# Altium PCB MainPCB.PcbDoc
Units mm, origin at the board's own origin, x right, y up, seen from the top; angles counter-clockwise.
Board outline 80.52 x 140.08 mm, 2 copper layers (Top Layer, Bottom Layer); 58 components, 58 nets, 243 pads, 38 vias.
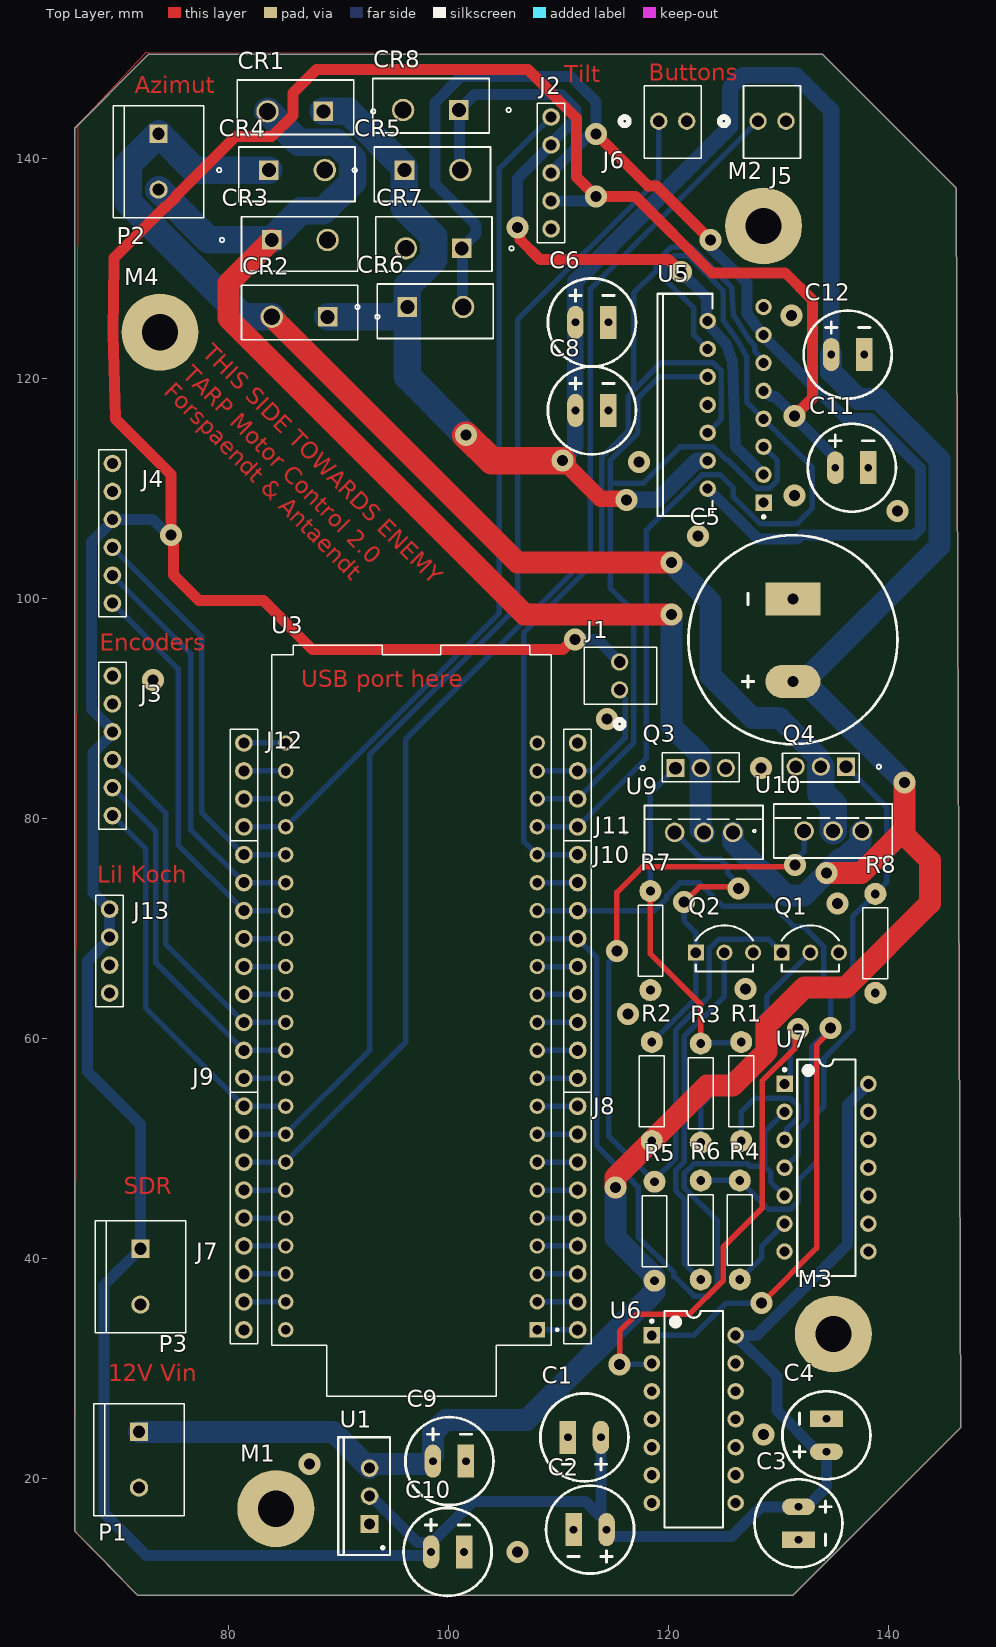
[diagram p0: Top Layer view]
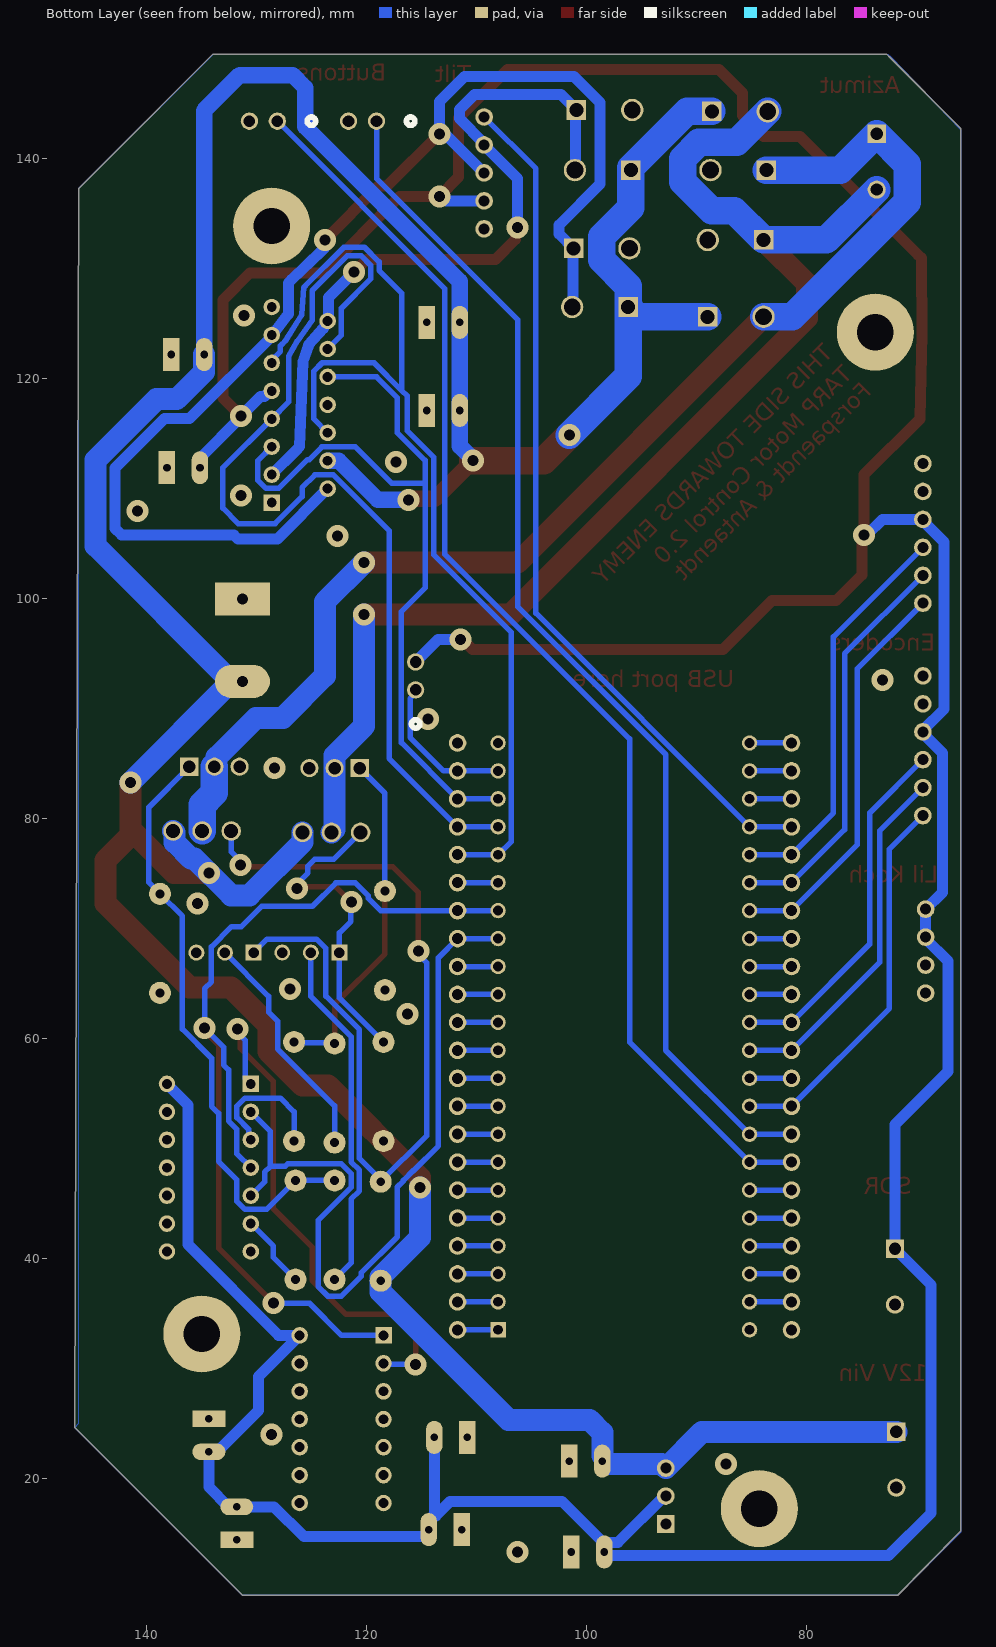
[diagram p1: Bottom Layer view, seen from below]
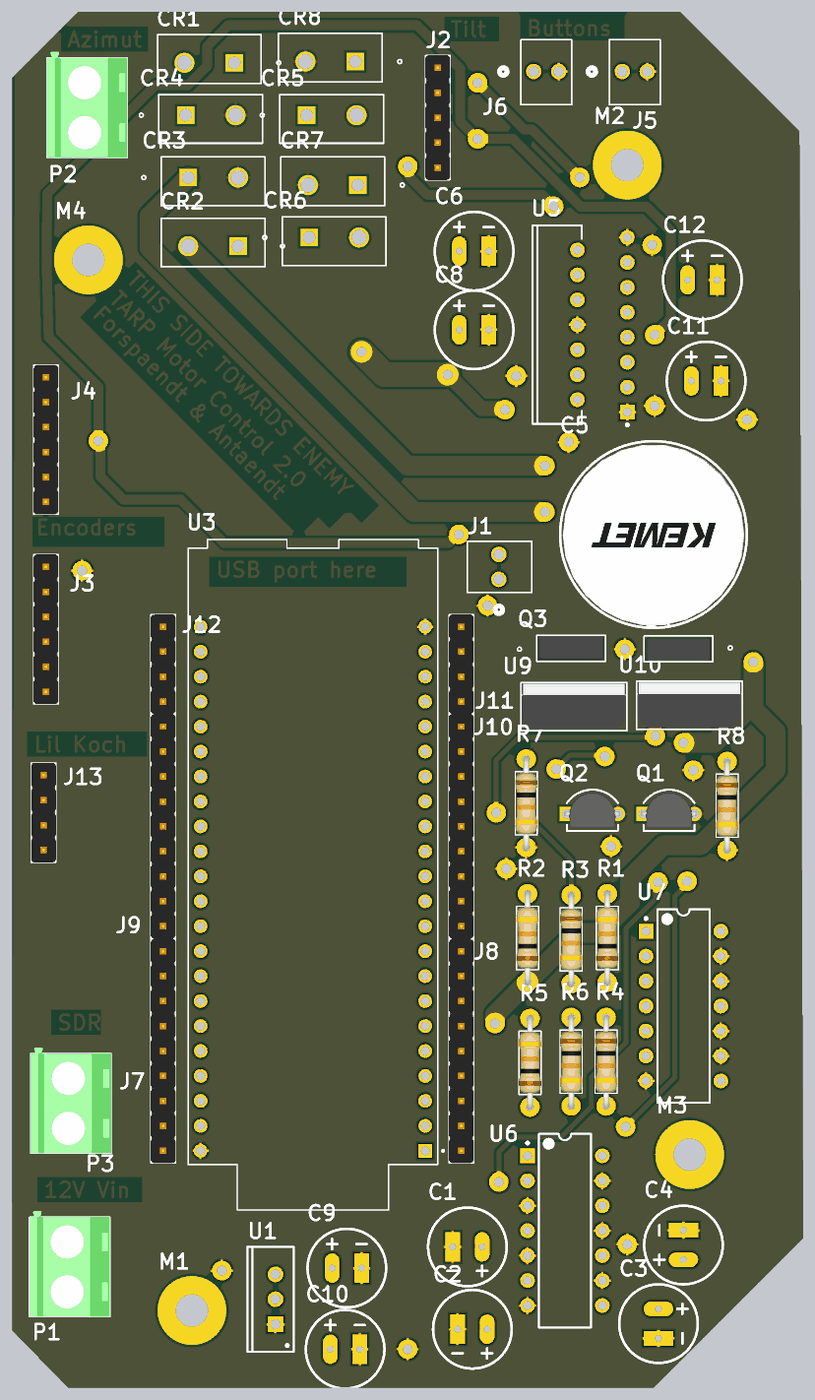
[diagram p2: 3D render of the assembled board from above, using the file's embedded part models]

## Layer stack, top to bottom
Top Solder: solder mask 0.0102, Solder Resist, Dk 3.5
Top Layer: signal copper 0.0356
Dielectric 1: dielectric 0.32, FR-4, Dk 4.8
Bottom Layer: signal copper 0.0356
Bottom Solder: solder mask 0.0102, Solder Resist, Dk 3.5

## Board outline
66.167,15.113 71.755,9.398 131.318,9.398 146.558,24.638 146.558,25.019 146.177,137.287 143.637,139.827 133.985,149.479 72.771,149.479 72.39,149.098 66.04,142.748 66.04,15.24

## Design rules (kind name [scope] priority, off if disabled: settings)
Clearance [All] p1: gap=0.254 ignorepadtopadclearanceinfootprint=FALSE
PolygonConnect [All] p1: connectstyle=Relief reliefconductorwidth=0.254 reliefentries=4 polygonreliefangle="90 Angle" airgapwidth=0.254
RoutingVias [All] p1: holewidth=1 width=2 viastyle="Through Hole" minholewidth=0.711 minwidth=1.7 maxholewidth=1.5 maxwidth=3
SolderMaskExpansion [All] p1: expansion=0.102 istentingtop=FALSE
SupplyNets "Schematic Supply Nets_1" [InNet('Vin')] p1: voltage=0.000
SupplyNets "Schematic Supply Nets_3" [InNet('GND')] p2: voltage=0.000
SupplyNets "Schematic Supply Nets_2" [InNet('+5')] p3: voltage=0.000
SupplyNets "Schematic Supply Nets" [InNet('+12')] p4: voltage=0.000
Width [All] p1: maxlimit=5 minlimit=0.5 preferedwidth=0.5 minimp=50.000000 maximp=50.000000 favimp=50.000000
30 further rules are at their usual default settings.

## Classes and differential pairs
component class H-bridge: C1 C2 C3 C4 C5 C6 CR1 CR2 CR3 CR4 Q1 Q2 Q3 Q4 R1 R2 R3 R4 R5 R6 R7 R8 U6 U7 U9 U10
component class MainPCBTARP: C8 C9 C10 C11 C12 CR5 CR6 CR7 CR8 J1 J2 J3 J4 J5 J6 J7 J8 J9 J10 J11 J12 J13 M1 M2 M3 M4 P1 P2 P3 U1 U3 U5

## Components (designator, comment, footprint, x,y, rotation, side; value= is the part's Value field where it differs from the comment)
C1 "Cap" "Cap Lyt Ø8" 113.871,23.749 r180 top value=1uF
C2 "Cap" "Cap Lyt Ø8" 114.379,15.367 r180 top value=100nF
C3 "Cap" "Cap Lyt Ø8" 131.826,17.438 r270 top value=1uF
C4 "Cap" "Cap Lyt Ø8" 134.366,22.439 r90 top value=100nF
C5 "Cap" "Cap Lyt Ø18" 131.318,92.456 r90 top value=1000uF
C6 "Cap" "Cap Lyt Ø8" 111.554,125.095 r0 top value=1uF
C8 "Cap" "Cap Lyt Ø8" 111.554,117.094 r0 top value=100nF
C9 "Cap" "Cap Lyt Ø8" 98.6,21.59 r0 top value=10uF
C10 "Cap" "Cap Lyt Ø8" 98.425,13.335 r0 top value=100uF
C11 "Cap" "Cap Lyt Ø8" 135.176,111.887 r0 top value=100nF
C12 "Cap" "Cap Lyt Ø8" 134.795,122.174 r0 top value=100nF
CR1 "BYV29-400" SOD59_WEN 88.646,144.272 r180 top
CR2 "BYV29-400" SOD59_WEN 89.027,125.603 r180 top
CR3 "BYV29-400" SOD59_WEN 83.947,132.588 r0 top
CR4 "BYV29-400" SOD59_WEN 83.693,138.938 r0 top
CR5 "BYV29-400" SOD59_WEN 96.012,138.938 r0 top
CR6 "BYV29-400" SOD59_WEN 96.266,126.492 r0 top
CR7 "BYV29-400" SOD59_WEN 101.219,131.826 r180 top
CR8 "BYV29-400" SOD59_WEN 100.965,144.399 r180 top
J1 "22232021" CONN_A-6373-02A_MOL 115.57,91.694 r90 top
J2 "22272051" "Header 1x5" 109.347,133.604 r90 top
J3 "Header 1x6" "Header 1x6" 69.469,92.964 r270 top
J4 "Header 1x6" "Header 1x6" 69.469,112.268 r270 top
J5 "22232021" CONN_A-6373-02A_MOL 128.143,143.383 r0 top
J6 "22232021" CONN_A-6373-02A_MOL 119.126,143.383 r0 top
J7 "Header 1x9" "Header 1x9" 81.407,33.528 r90 top
J8 "Header 1x9" "Header 1x9" 111.76,33.528 r90 top
J9 "Header 1x9" "Header 1x9" 81.407,56.388 r90 top
J10 "Header 1x9" "Header 1x9" 111.76,56.388 r90 top
J11 "Header 1x4" "Header 1x4" 111.76,79.248 r90 top
J12 "Header 1x4" "Header 1x4" 81.407,79.248 r90 top
J13 "Header 1x4" "Header 1x4" 69.215,64.135 r90 top
M1 "Screw Hole" "M3 Hole" 84.328,17.272 r0 top
M2 "Screw Hole" "M3 Hole" 128.651,133.858 r0 top
M3 "Screw Hole" "M3 Hole" 135.001,33.147 r0 top
M4 "Screw Hole" "M3 Hole" 73.787,124.206 r0 top
P1 "282837-2" TE_282837-2 71.882,21.717 r270 top
P2 "282837-2" TE_282837-2 73.66,139.7 r270 top
P3 "282837-2" TE_282837-2 72.009,38.354 r270 top
Q1 "BC546CTA" FP-135AR-MFG 132.902,68.198 r90 top
Q2 "BC546CTA" FP-135AR-MFG 125.095,68.199 r90 top
Q3 "IRLU024NPBF" PG-TO251-3-901_INF 120.65,84.582 r0 top
Q4 "IRLU024NPBF" PG-TO251-3-901_INF 136.144,84.709 r180 top
R1 "Resistor" "RES THT 9mm" 126.619,59.69 r270 top value=100
R2 "Resistor" "RES THT 9mm" 118.491,59.69 r270 top value=10K
R3 "Resistor" "RES THT 9mm" 122.936,50.546 r90 top value=10K
R4 "Resistor" "RES THT 9mm" 126.492,38.1 r90 top value=100
R5 "Resistor" "RES THT 9mm" 118.745,46.99 r270 top value=10K
R6 "Resistor" "RES THT 9mm" 122.936,38.1 r90 top value=10K
R7 "Resistor" "RES THT 9mm" 118.364,64.406 r90 top value=10K
R8 "Resistor" "RES THT 9mm" 138.811,64.152 r90 top value=10K
U1 "LM1084" T03B 92.837,18.415 r90 top
U3 "ESP32-S3-DEVKITM-1-N8" MODULE_ESP32-S3-DEVKITM-1-N8 96.647,63.498 r180 top
U5 "L298N" STM-FM-15 126.111,117.602 r180 top
U6 "SN74HC04N" N0014A 122.301,25.4 r0 top
U7 "SN74HC08N" N0014A 134.366,48.26 r0 top
U9 "IRF9530PBF" TO220AB_VIS 120.577,78.74 r0 top
U10 "IRF9530PBF" TO220AB_VIS 132.334,78.867 r0 top

## Footprints (in the part's own frame and the unit in brackets; to place one, negate y for a bottom-side part, rotate by r counter-clockwise, add the part's x,y. Pads: shape width x height; smd on the part's side, far side on the other; paste and mask are expansions set on the pad)
"Cap Lyt Ø8" [mm] "Capacitor"
  oval 1.5x3 hole 0.7: 1(0,0)
  rect 1.5x3 hole 0.7: 2(3,0)
  silkscreen extent -2.5,-4 5.5,4
"Cap Lyt Ø18" [mm] "Capacitor"
  oval 3x5 hole 1: 1(0,0)
  rect 3x5 hole 1: 2(7.5,0)
  silkscreen extent -5.7,-9.5 13.3,9.5, body extent -5.5,-9.25 13,9.25, height 38
CONN_A-6373-02A_MOL [mil]
  round 62 hole 42: 1(0,0) 2(100,0)
  silkscreen extent -137,-133 152,127
FP-135AR-MFG [mm]
  rect 1.45x1.45 hole 0.95 paste-2539.97 mask+0: 1(-0.38,2.6)
  round 1.45 hole 0.95 paste-2539.97 mask+0: 2(-0.38,0) 3(-0.38,-2.6)
  silkscreen extent -2.09,-2.6 2.09,2.6, body extent -2.19,-3.42 2.19,3.42, height 0.25
"Header 1x4" [mm]
  round 1.6 hole 1: 1(0,0) 2(2.54,0) 3(5.08,0) 4(7.62,0)
  silkscreen extent -1.25,-1.25 8.87,1.25, body extent -1.27,-1.27 8.89,1.27, height 8.89
"Header 1x5" [mm]
  round 1.6 hole 1: 1(0,0) 2(2.54,0) 3(5.08,0) 4(7.62,0) 5(10.16,0)
  silkscreen extent -1.25,-1.25 11.41,1.25, body extent -1.27,-1.27 11.43,1.27, height 8.89
"Header 1x6" [mm]
  round 1.6 hole 1: 1(0,0) 2(2.54,0) 3(5.08,0) 4(7.62,0) 5(10.16,0) 6(12.7,0)
  silkscreen extent -1.25,-1.25 13.95,1.25, body extent -1.26,-1.27 13.98,1.27, height 8.89
"Header 1x9" [mm]
  round 1.6 hole 1: 1(0,0) 2(2.54,0) 3(5.08,0) 4(7.62,0) 5(10.16,0) 6(12.7,0) 7(15.24,0) 8(17.78,0) 9(20.32,0)
  silkscreen extent -1.25,-1.25 21.57,1.25, body extent -1.27,-1.27 21.59,1.27, height 8.89
"M3 Hole" [mm]
  round 7 hole 3.3 mask+0: 1(0,0)
MODULE_ESP32-S3-DEVKITM-1-N8 [mil]
  rect 55x55 / inner round 55 / far side rect 55x55 hole 35: J1_1(-450,1179.92)
  round 55 hole 35: J1_2(-450,1079.92) J1_3(-450,979.92) J1_4(-450,879.92) J1_5(-450,779.92) J1_6(-450,679.92) J1_7(-450,579.92) J1_8(-450,479.92) J1_9(-450,379.92) J1_10(-450,279.92) J1_11(-450,179.92) J1_12(-450,79.92) J1_13(-450,-20.08) J1_14(-450,-120.08) J1_15(-450,-220.08) J1_16(-450,-320.08) J1_17(-450,-420.08) J1_18(-450,-520.08) J1_19(-450,-620.08) J1_20(-450,-720.08) J1_21(-450,-820.08) J1_22(-450,-920.08) J3_1(450,1179.92) J3_2(450,1079.92) J3_3(450,979.92) J3_4(450,879.92) J3_5(450,779.92) J3_6(450,679.92) J3_7(450,579.92) J3_8(450,479.92) J3_9(450,379.92) J3_10(450,279.92) J3_11(450,179.92) J3_12(450,79.92) J3_13(450,-20.08) J3_14(450,-120.08) J3_15(450,-220.08) J3_16(450,-320.08) J3_17(450,-420.08) J3_18(450,-520.08) J3_19(450,-620.08) J3_20(450,-720.08) J3_21(450,-820.08) J3_22(450,-920.08)
  silkscreen extent -526,-1269 500,1417
N0014A [mm] "DIP, 14-Leads, Body 19.7x6.6mm, Pitch 2.54mm"
  rect 1.5x1.5 hole 0.9: 1(-3.81,7.62)
  round 1.5 hole 0.9: 2(-3.81,5.08) 3(-3.81,2.54) 4(-3.81,0) 5(-3.81,-2.54) 6(-3.81,-5.08) 7(-3.81,-7.62) 8(3.81,-7.62) 9(3.81,-5.08) 10(3.81,-2.54) 11(3.81,0) 12(3.81,2.54) 13(3.81,5.08) 14(3.81,7.62)
  silkscreen extent -3.93,-9.85 2.65,9.85, body extent -3.95,-9.85 3.95,9.85, height 5.08
PG-TO251-3-901_INF [mil]
  rect 65x65 / inner round 60 / far side rect 65x65 hole 45 paste-99999 mask+0: 1(0,0)
  round 65 / inner round 60 / far side round 65 hole 45 paste-99999 mask+0: 2(90,0) 3(180,0)
  silkscreen extent -125,-49 228,55, body extent -43,-44 222,50, height 384
"RES THT 9mm" [mm]
  round 2 hole 0.8: 1(0,0) 2(9,0)
  silkscreen extent 1.28,-1.12 7.73,1.12, body extent -0.32,-1.13 9.28,1.14, height 2.36
SOD59_WEN [mil]
  rect 70x70 / inner round 60 / far side rect 70x70 hole 50 paste-99999 mask+0: 1(0,0)
  round 80 / inner round 60 / far side round 80 hole 60 paste-99999 mask+0: 2(200,0)
  silkscreen extent -186,-113 308,83
STM-FM-15 [mm] "FM, 15-Leads, Body 20.2x5mm, Pitch 1.27mm"
  rect 1.5x1.5 hole 0.9: 1(-2.54,8.89)
  round 1.5 hole 0.9: 2(2.54,7.62) 3(-2.54,6.35) 4(2.54,5.08) 5(-2.54,3.81) 6(2.54,2.54) 7(-2.54,1.27) 8(2.54,0) 9(-2.54,-1.27) 10(2.54,-2.54) 11(-2.54,-3.81) 12(2.54,-5.08) 13(-2.54,-6.35) 14(2.54,-7.62) 15(-2.54,-8.89)
  silkscreen extent -2.67,-10.1 7.09,10.31, body extent -2.8,-10.1 7.09,10.1, height 21
T03B [mm] "TO, Thru-Hole, Vertical, Heatsink Mounted; 3 In-Line Leads; Pitch 2.54 mm"
  rect 1.6x1.6 hole 1: 1(-2.54,0)
  round 1.6 hole 1: 2(0,0) 3(2.54,0)
  silkscreen extent -5.35,-1.85 5.35,2.85, body extent -5.4,-1.9 5.4,2.9, height 19.8
TE_282837-2 [mm]
  rect 1.65x1.65 / inner round 1.65 / far side rect 1.65x1.65 hole 1.1: 1(-2.54,0)
  round 1.65 hole 1.1: 2(2.54,0)
  silkscreen extent -5.08,-4.1 5.08,4.1, body extent -5.68,-4.1 5.08,4.1, height 10
TO220AB_VIS [mil]
  round 70 / inner round 60 / far side round 70 hole 50 paste-99999 mask+0: 1(0,0) 2(103.94,0) 3(207.87,0)
  silkscreen extent -183,-96 316,96, body extent -103,-91 311,91, height 600

## Part data
C1 C2 C3 C4 C5 C6 C8 C9 C10 C11 C12: library part "Capacitor electrolytic"
CR1 CR2 CR3 CR4 CR5 CR6 CR7 CR8: library part BYV29-500, "No Description Available", Manufacturer_Name="WeEN Semiconductors", Copyright="Copyright (C) 2025 Ultra Librarian. All rights reserved.", Manufacturer_Part_Number=BYV29-500
J1 J5 J6: library part CMP-005-000000-1, "Connector Header Through Hole 2 position 0.100 (2.54mm)", Package=None, Check_prices=https://www.snapeda.com/parts/22232021/Molex/view-part/?ref=eda, Component Type=Standard, Design Item ID=22232021, MF=Molex, MP=22232021, Pin Count=2, SnapEDA_Link=https://www.snapeda.com/parts/22232021/Molex/view-part/?ref=snap, Source=22232021.SchLib
J2: "KK 254 Wire-to-Board Header, Vertical, with Friction Lock, 5 Circuits, Tin (Sn) Plating", Manufacturer_Name="Molex Connector Corporation", Copyright="Copyright (C) 2025 Ultra Librarian. All rights reserved.", Datasheet=https://www.molex.com/en-us/products/part-detail-pdf/22272051?display=pdf, Manufacturer_Part_Number=22272051, RefDes=RefDes, Type=Type
P1 P2 P3: library part CMP-007-000000-1, "Ð Ð°Ð·ÑŠÐµÐ¼Ð½Ñ‹Ðµ ÐºÐ»ÐµÐ¼Ð¼Ð½Ñ‹Ðµ ÐºÐ¾Ð»Ð¾Ð´ÐºÐ¸ Ð Ð¾Ð·ÐµÑ‚ÐºÐ° 2 Ð¿Ð¾Ð»Ð¾Ð¶ÐµÐ½Ð¸Ñ 5,08 Ð¼Ð¼ ÐŸÑ€Ð¸Ð¿Ð¾Ð¹ Ð¿Ñ€ÑÐ¼Ð¾Ð¹ Ñ‡ÐµÑ€ÐµÐ· Ð¾Ñ‚Ð²ÐµÑ€ÑÑ‚Ð¸Ðµ 13,5 Ð / ÐºÐ¾Ð½Ñ‚Ð°ÐºÑ‚", Package=None, Availability="In Stock", Check_prices=https://www.snapeda.com/parts/282837-2/TE+Connectivity+AMP+Connectors/view-part/?ref=eda, Component Type=Standard, Design Item ID=282837-2, MF="TE Connectivity", MP=282837-2, Pin Count=2, Price=None, Purchase-URL=https://pricing.snapeda.com/search/part/282837-2/?ref=eda, SnapEDA_Link=https://www.snapeda.com/parts/282837-2/TE+Connectivity+AMP+Connectors/view-part/?ref=snap, Source=282837-2.SchLib
Q1 Q2: library part CMP-00278-84408942-1, "BC546CTA Small Signal Bipolar Transistor, 0.1A I(C), 65V V(BR)CEO, 1-Element, NPN, Silicon, TO-92", Case/Package=TO-92-3, Collector Base Voltage (VCBO)=80V, Collector Emitter Breakdown Voltage=65V, Collector Emitter Saturation Voltage=250mV, Current Rating=100mA, Emitter Base Voltage (VEBO)=6V, Frequency=300MHz, Manufacturer Lifecycle Status=ACTIVE, Max Junction Temperature (Tj)=150°C, Max Power Dissipation=500mW, Min Operating Temperature=-65°C, Collector Emitter Voltage (VCEO)=65V, Contact Plating=Tin, Element Configuration=Single, Gain Bandwidth Product=300MHz, Height=4.58mm, hFE Min=110, Lead Free="Lead Free", Length=4.58mm, Lifecycle Status=Production, Max Breakdown Voltage=65V, Max Collector Current=100mA, Max Frequency=300MHz, Max Operating Temperature=150°C, Mount="Through Hole", NexarPartId=84408942, Number of Elements=1, Number of Pins=3, Polarity=NPN, Power Dissipation=500mW, Radiation Hardening=No, RoHS=Compliant, Schedule B="8541210080, 8541210080", Transition Frequency=300MHz, Voltage Rating (DC)=65V, Weight=240mg, Width=3.86mm
Q3 Q4: "The IR MOSFET family of power MOSFETs utilizes proven silicon processes offering designers a wide portfolio of devices to support various applications such as DC motors, inverters, SMPS, lighting, load switches as well as battery powered applications.The devices are available in a variety of surface mount and through-hole packages with industry standard footprints for ease of design.", Manufacturer_Name=Infineon, Copyright="Copyright (C) 2025 Ultra Librarian. All rights reserved.", Datasheet=https://www.infineon.com/dgdl/irlr024npbf.pdf?fileId=5546d462533600a4015356694f7f265d, Manufacturer_Part_Number=IRLU024NPBF
U1: library part CMP-0062-02512-2, "1.5A Low Dropout Positive Regulators, 3-pin TO-220", Manufacturer="National Semiconductor", PackageTopMarking=NSUZXYTTE#*LM1086*CT-3.3, PowerWise=N, ComponentLink1Description="LM1086 Datasheet", ComponentLink1URL=http://www.national.com/ds/LM/LM1086.pdf, ComponentLink2Description="LM1086 Web Page", ComponentLink2URL=http://www.national.com/pf/LM/LM1086.html, ComponentLink3Description="T03B Package Page", ComponentLink3URL=http://www.national.com/packaging/folders/t03b.html, CompType="LDO IC", DatasheetVersion=Jun-2005, PackageDescription="TO-220, Molded, 3 Lead, Straight", PackageReference=T03B, PackageVersion="revL, Jan-1992", PinCount=3, RevisionNote="Component URLs added", RoHS=N
U3: library part CMP-003-000000-1, Package=None, Availability=Unavailable, Component Type=Standard, Design Item ID=ESP32-S3-DEVKITM-1-N8, MF="{'manufacturer': u'Espressif Systems'}", MP=ESP32-S3-DEVKITM-1-N8, Pin Count=44, Price=None, Source=ESP32-S3-DEVKITM-1-N8.SchLib
U5: library part CMP-2000-06526-1, "Dual Full-Bridge Driver, 4.8 to 46 V, -40 to 150 degC, 15-Pin FM (MW 15L), RoHS, Tube", Driver Case Style=Multiwatt, Manufacturer=STMicroelectronics, Operating Temperature Max=130°C, Operating Temperature Min=-25°C, Output Current=2A, Output Voltage=46V, Package Description="15-Pin Flange Mount, Body 5 x 19.6 mm, Pitch 1.27 mm", Package Reference=FM-15, PartNumber=L298, Supply Voltage Max=7V, Supply Voltage Min=4.5V, Automotive Qualification Standard=-, Datasheet URL=https://datasheet.ciiva.com/15109/getdatasheetpartid-50682-15109332.pdf, Datasheet Version=01/2000, Manufacturer URL=http://www.st.com/, Motor Type=FullBridge, Mounting Technology=ThroughHole, MSL=-, No. of Outputs=4Outputs, No. of Pins=15Pins, Packaging=Each, Product Range=-, SVHC=NoSVHC(17-Dec-2015)
U6: library part CMP-1615-00892-2, "Hex Inverters, N0014A, TUBE", F @ Nom Voltage(Max)(Mhz)=20, Generic Part Number=SN74HC04, ICC @ Nom Voltage(Max)(mA)=0.02, Manufacturer="Texas Instruments", Operating Temperature Range(C)="-40 to 85", Rating=Catalog, Voltage(Nom)(V)=5, Bits(#)=6, Code_JEDEC=MS-001, DatasheetVersion=SCLS078F, Input Type=CMOS, Output Drive (IOL/IOH)(Max)(mA)=-4/4, Output Type=CMOS, PackageReference=N0014A, Schmitt Trigger=No, Technology Family=HC, tpd @ Nom Voltage(Max)(ns)=20, VCC(Max)(V)=6, VCC(Min)(V)=2
U7: library part CMP-0777-00250-3, "Quadruple 2-Input Positive-AND Gates, N0014A, TUBE", F @ Nom Voltage(Max)(Mhz)=70, Generic Part Number=SN74HC08, ICC @ Nom Voltage(Max)(mA)=0.02, Manufacturer="Texas Instruments", Operating Temperature Range(C)="-40 to 85", Rating=Catalog, tpd @ Nom Voltage(Max)(ns)=28, Voltage(Nom)(V)=5, Bits(#)=4, DatasheetVersion=SCLS081F, Input Type=CMOS, Output Type=CMOS, PackageReference=N0014A, Schmitt Trigger=No, Technology Family=HC, VCC(Max)(V)=6, VCC(Min)(V)=2
U9 U10: "MOSFET P-CHANNEL 100V", Manufacturer_Name=Vishay, Copyright="Copyright (C) 2025 Ultra Librarian. All rights reserved.", Manufacturer_Part_Number=IRF9530PBF

## Via types
v1: diameter 2, hole 1, Top Layer to Bottom Layer, 38 vias

## Nets (pads, with @x,y where several pads share a name; then routed paths per layer and width w, separated by ;. In a path a pad name is that pad's centre, name@x,y a point inside that pad or via, vN(x,y) a via of type N, cw(c..) or ccw(c..) an arc to the next point about the centre after c; other vN are vias at no path point)
+5: C1.1 C2.1 C3.1 C4.1 C10.1 C11.1 J1.2 J2.2 J3.3 J4.3 J13.3 J13.4 P3.1 U1.2 U5.9 U6.14 U7.14 | length 421.6
  Top Layer w1: v1(74.803,105.791) 74.803,111.263 69.734,116.332 69.534,124.095 cw(c73.787,124.206) 69.533,124.249 69.597,130.534 69.601,130.942 69.89,131.231 74.24,135.581 74.314,135.581 75.239,136.506 75.239,136.58 80.645,141.986 83.947,141.986 85.872,143.911 85.872,145.943 88.011,148.082 107.227,148.082 111.657,143.652 111.657,138.307 113.411,136.553 v1(113.411,136.525) 117.023,136.525 123.944,129.604 130.619,129.604 133.096,127.127 133.096,118.237 v1(131.445,116.586) ; v1@75.021,105.77 74.994,105.743 74.994,104.893 75.021,104.866 75.021,102.144 77.343,99.822 83.185,99.822 87.63,95.377 110.42,95.377 111.309,96.266 v1(111.506,96.266)
  Bottom Layer w1: v1(74.803,105.791) 74.532,105.791 73.135,107.188 J4.3 69.469,107.043 67.564,105.138 67.564,89.934 69.469,88.029 J3.3 69.469,87.739 67.691,85.961 67.691,73.279 J13.4 J13.3 69.215,69.07 67.183,67.038 67.183,57.011 72.009,52.185 P3.1 68.707,37.592 68.707,16.891 72.58,13.018 98.194,13.018 98.425,13.249 C10.1 ; U1.2 92.963,18.415 97.198,14.181 98.194,14.181 C10.1@98.425,13.95 ; C10.1@98.425,14.085 102.247,17.907 112.454,17.907 113.736,16.625 ; J2.2 112.759,136.144 113.14,136.525 v1(113.411,136.525) ; v1(111.506,96.266) 113.538,96.266 J1.2 ; C1.1 113.871,16.76 C2.1@114.379,16.252 ; C2.1@114.379,15.982 114.379,14.963 114.61,14.732 125.73,14.732 128.436,17.438 C3.1 132.576,17.438 134.366,19.228 C4.1 133.616,22.439 129.864,26.191 129.864,29.267 U6.14 128.016,33.02 136.271,41.275 136.271,53.975 U7.14 ; U5.9 128.786,118.872 129.305,118.354 129.677,118.354 v1(131.445,116.586) 131.445,116.477 135.176,112.746 C11.1
+12: C5.1 C6.1 C8.1 C9.1 C12.1 CR1.1 CR2.1 CR5.1 CR6.1 P1.1 R2.2 R5.2 U1.3 U5.4 U9.3 U10.3 | length 344.8
  Top Layer w1.5: v1(110.363,112.522) 113.823,109.062 116.109,109.062 v1(116.205,108.966)
  Top Layer w2: v1(115.189,46.482) 115.189,47.388 123.532,55.731 125.847,55.731 128.937,58.82 128.937,61.23 132.35,64.643 136.114,64.643 143.764,72.293 143.764,76.2 141.218,78.746 ; v1(134.372,75.051) 137.522,75.051 141.218,78.746 ; v1(141.478,83.296) 141.478,79.007 141.218,78.746
  Top Layer w2.5: v1(101.597,114.855) 103.931,112.522 v1(110.363,112.522)
  Bottom Layer w1.5: v1(110.363,112.522) 110.363,112.657 111.554,113.848 C8.1 C6.1 111.554,128.826 125.603,142.875 125.603,146.431 126.746,147.574 131.572,147.574 134.795,144.351 C12.1 ; v1(116.205,108.966) 119.008,108.966 122.564,112.522 U5.4
  Bottom Layer w2: P1.1 89.535,24.257 U1.3 93.222,21.34 C9.1@98.35,21.34 ; C9.1@98.6,22.09 98.6,24.18 99.772,25.351 107.139,25.351 118.745,36.957 R5.2 118.745,38.344 115.189,41.9 v1(115.189,46.482) ; U9.3 125.857,77.851 130.686,73.022 132.343,73.022 135.685,76.363 136.011,76.363 137.478,77.83 137.478,78.731 U10.3 ; C5.1 C5.1@132.318,92.456 ; C12.1 134.795,120.602 137.287,118.11 139.133,118.11 144.653,112.59 144.653,104.791 C5.1@132.318,92.456 ; v1(141.478,83.296) C5.1@132.318,92.456
  Bottom Layer w2.5: CR1.1 90.898,144.272 96.012,139.158 CR5.1 96.012,135.517 98.659,132.87 98.659,130.782 96.266,128.389 CR6.1 ; CR2.1 95.377,125.603 CR6.1 ; v1(101.597,114.855) 96.266,120.187 CR6.1
GND: C1.2 C2.2 C3.2 C4.2 C5.2 C6.2 C8.2 C9.2 C10.2 C11.2 C12.2 CR3.2 CR4.2 CR7.2 CR8.2 J2.1 J3.1 J3.2 J4.1 J4.2 J5.2 J6.2 J7.1 J11.4 J13.1 J13.2 P1.2 P3.2 Q1.3 Q2.3 Q3.3 Q4.3 R7.1 R8.1 U1.1 U3.J1_22 U3.J3_1 U5.1 U5.8 U5.15 U6.3 U6.5 U6.7 U6.9 U6.11 U6.13 U7.7 U7.9 U7.10 U7.12 U7.13
  other v1: 106.299,13.335 87.376,21.336 128.651,24.003 116.332,62.23 127,64.516 135.382,72.263 128.397,84.582 114.427,89.027 73.152,92.583 122.682,105.664 140.843,107.95 131.445,109.347 117.348,112.395 131.191,125.73
NetCR1_2: CR1.2 CR3.1 P2.2 Q3.2 U9.2 | length 114.5
  Top Layer w2: CR3.1 80.01,128.651 80.01,125.476 106.934,98.552 v1(120.269,98.552)
  Bottom Layer w2: v1(120.269,98.552) 120.269,88.387 122.936,85.72 Q3.2 122.936,79.021 U9.2
  Bottom Layer w2.5: P2.2 78.232,132.588 CR3.1 86.6,135.241 88.64,135.241 91.293,137.894 91.293,139.982 89.817,141.458 86.38,141.458 CR1.2
NetCR2_2: CR2.2 CR4.1 P2.1 Q4.2 U10.2 | length 113.6
  Top Layer w2: CR2.2 106.299,103.251 v1(120.269,103.251)
  Bottom Layer w2: v1(120.269,103.251) 123.825,99.695 123.825,92.964 127.635,89.154 130.068,89.154 133.652,85.57 133.652,84.915 Q4.2
  Bottom Layer w2.5: CR4.1 76.962,138.938 P2.1 70.906,139.486 70.906,136.019 81.322,125.603 CR2.2 ; Q4.2 133.858,82.346 134.974,81.23 U10.2
NetCR5_2: CR5.2 CR8.1 J2.4 U5.3 U5.14 | length 68.4
  Top Layer w1: v1(106.299,133.731) 106.49,133.54 106.49,132.651 108.331,130.81 120.015,130.81 v1(121.158,129.667)
  Bottom Layer w1: CR5.2 101.028,139.001 101.028,144.335 CR8.1 102.362,145.796 110.236,145.796 111.591,144.441 111.591,143.613 109.347,141.369 J2.4 106.299,138.176 v1(106.299,133.731) ; v1(121.158,129.667) 123.475,127.35 123.475,125.318 U5.14 123.964,124.551 125.303,123.05 125.811,121.549 126.111,113.792 126.388,113.515 126.404,113.499 U5.3
NetCR6_2: CR6.2 CR7.1 J2.3 U5.2 U5.13 | length 117.1
  Top Layer w1: v1(113.411,142.24) 118.169,137.482 118.931,137.482 v1(123.825,132.588)
  Bottom Layer w1: CR6.2 101.282,126.555 101.282,131.762 CR7.1 102.519,133.126 102.519,133.955 98.806,137.668 98.806,145.084 101.169,147.447 111.125,147.447 113.411,145.161 v1(113.411,142.24) 113.22,142.049 112.712,142.049 J2.3 ; U5.2 128.143,105.41 131.722,105.41 132.103,105.791 142.313,105.791 142.899,106.377 142.899,111.863 138.406,116.356 136.112,116.356 128.651,123.817 U5.13 128.421,124.182 127.147,125.869 127.135,128.276 127.133,128.687 126.834,128.986 124.133,131.571 123.841,131.863 v1(123.825,132.588)
NetJ2_5: J2.5 J12.1 U3.J3_19 | length 78.3
  Bottom Layer w0.5: J12.1 U3.J3_19 104.648,98.679 104.648,139.065 J2.5
NetJ3_4: J3.4 J9.3 U3.J3_12 | length 32.6
  Bottom Layer w0.5: J3.4 74.295,80.518 74.295,68.58 J9.3 U3.J3_12
NetJ3_5: J3.5 J9.2 U3.J3_11 | length 32.6
  Bottom Layer w0.5: J3.5 73.406,78.867 73.406,66.929 J9.2 U3.J3_11
NetJ3_6: J3.6 J7.9 U3.J3_9 | length 35.2
  Bottom Layer w0.5: J3.6 72.517,77.216 72.517,62.738 J7.9 U3.J3_9
NetJ4_4: J4.4 J9.9 U3.J3_18 | length 36.7
  Bottom Layer w0.5: J4.4 77.597,96.52 77.597,80.518 J9.9 U3.J3_18
NetJ4_5: J4.5 J9.8 U3.J3_17 | length 36.7
  Bottom Layer w0.5: J4.5 76.581,94.996 76.581,78.994 J9.8 U3.J3_17
NetJ4_6: J4.6 J9.7 U3.J3_16 | length 36.7
  Bottom Layer w0.5: J4.6 75.438,93.599 75.438,77.597 J9.7 U3.J3_16
NetJ5_1: J5.1 J7.7 U3.J3_7 | length 116.2
  Bottom Layer w0.5: J7.7 U3.J3_7 96.128,59.679 96.128,87.238 112.903,104.013 112.903,128.143 J5.1
NetJ6_1: J6.1 J7.8 U3.J3_8 | length 109.9
  Bottom Layer w0.5: J7.8 U3.J3_8 92.837,58.928 92.837,85.802 106.299,99.264 106.299,125.344 119.126,138.171 J6.1
NetJ7_2: J7.2 U3.J3_2 | length 3.8
  Bottom Layer w0.5: J7.2 U3.J3_2
NetJ7_3: J7.3 U3.J3_3 | length 3.8
  Bottom Layer w0.5: J7.3 U3.J3_3
NetJ7_4: J7.4 U3.J3_4 | length 3.8
  Bottom Layer w0.5: J7.4 U3.J3_4
NetJ7_5: J7.5 U3.J3_5 | length 3.8
  Bottom Layer w0.5: J7.5 U3.J3_5
NetJ7_6: J7.6 U3.J3_6 | length 3.8
  Bottom Layer w0.5: J7.6 U3.J3_6
NetJ8_1: J8.1 U3.J1_1 | length 3.7
  Bottom Layer w0.5: U3.J1_1 J8.1
NetJ8_2: J8.2 U3.J1_2 | length 3.7
  Bottom Layer w0.5: U3.J1_2 J8.2
NetJ8_3: J8.3 U3.J1_3 | length 3.7
  Bottom Layer w0.5: U3.J1_3 J8.3
NetJ8_4: J8.4 U3.J1_4 | length 3.7
  Bottom Layer w0.5: U3.J1_4 J8.4
NetJ8_5: J8.5 U3.J1_5 | length 3.7
  Bottom Layer w0.5: U3.J1_5 J8.5
NetJ8_6: J8.6 U3.J1_6 | length 3.7
  Bottom Layer w0.5: U3.J1_6 J8.6
NetJ8_7: J8.7 U3.J1_7 | length 3.7
  Bottom Layer w0.5: U3.J1_7 J8.7
NetJ8_8: J8.8 U3.J1_8 | length 3.7
  Bottom Layer w0.5: U3.J1_8 J8.8
NetJ8_9: J8.9 U3.J1_9 | length 3.7
  Bottom Layer w0.5: U3.J1_9 J8.9
NetJ9_1: J9.1 U3.J3_10 | length 3.8
  Bottom Layer w0.5: J9.1 U3.J3_10
NetJ9_4: J9.4 U3.J3_13 | length 3.8
  Bottom Layer w0.5: J9.4 U3.J3_13
NetJ9_5: J9.5 U3.J3_14 | length 3.8
  Bottom Layer w0.5: J9.5 U3.J3_14
NetJ9_6: J9.6 U3.J3_15 | length 3.8
  Bottom Layer w0.5: J9.6 U3.J3_15
NetJ10_1: J10.1 U3.J1_10 | length 3.7
  Bottom Layer w0.5: U3.J1_10 J10.1
NetJ10_2: J10.2 U3.J1_11 | length 3.7
  Bottom Layer w0.5: U3.J1_11 J10.2
NetJ10_3: J10.3 U3.J1_12 | length 3.7
  Bottom Layer w0.5: U3.J1_12 J10.3
NetJ10_4: J10.4 U3.J1_13 | length 3.7
  Bottom Layer w0.5: U3.J1_13 J10.4
NetJ10_5: J10.5 U3.J1_14 | length 3.7
  Bottom Layer w0.5: U3.J1_14 J10.5
NetJ10_6: J10.6 U3.J1_15 U7.2 U7.5 | length 71.5
  Bottom Layer w0.5: U3.J1_15 J10.6 113.502,67.346 113.502,50.24 115.756,47.986 115.812,47.986 116.693,47.105 116.693,47.049 117.241,46.501 117.241,41.975 120.499,38.717 120.499,38.41 122.313,36.596 123.559,36.596 124.44,37.477 124.44,43.469 121.432,46.477 121.432,47.723 122.313,48.604 127.215,48.604 127.432,48.387 128.778,48.387 ; U7.5 129.302,46.974 129.302,47.863 128.778,48.387 ; U7.2 128.778,51.562 128.778,48.387
NetJ10_7: J10.7 U3.J1_16 U6.1 U7.4 | length 90.5
  Top Layer w0.5: v1(128.482,35.967) 128.493,35.967 133.477,40.951 133.477,59.402 134.747,60.672 v1(134.747,60.96)
  Bottom Layer w0.5: U3.J1_16 J10.7 118.745,71.628 119.868,72.751 119.868,72.973 121.043,74.148 122.829,74.148 124.968,72.009 129.572,72.009 131.413,70.168 132.29,70.168 134.131,68.327 134.131,65.154 134.747,64.538 v1(134.747,60.96) 133.019,59.232 133.019,57.6 132.564,57.145 132.564,52.508 131.81,51.754 131.81,49.514 U7.4 ; U6.1 122.297,33.02 125.218,35.941 128.456,35.941 v1(128.482,35.967)
NetJ10_8: J10.8 U3.J1_17 | length 3.7
  Bottom Layer w0.5: U3.J1_17 J10.8
NetJ10_9: J10.9 U3.J1_18 U5.6 U5.11 | length 95.2
  Bottom Layer w0.5: J10.9 U3.J1_18 106.875,77.91 106.875,96.918 113.947,103.991 113.947,112.854 116.332,115.239 116.332,118.414 116.84,118.922 ; U5.6 124.825,116.316 124.825,120.661 124.058,121.428 119.346,121.428 116.84,118.922 ; U5.11 128.651,121.683 127.869,122.465 127.869,122.961 127.723,123.107 127.397,123.433 125.972,125.721 125.905,125.828 125.758,128.26 125.624,128.394 122.093,131.925 120.223,131.925 118.9,130.602 118.9,129.822 116.84,127.762 116.84,118.922
NetJ11_1: J11.1 U3.J1_19 U5.7 U5.12 | length 92.4
  Bottom Layer w0.5: U3.J1_19 J11.1 117.983,85.471 117.983,106.167 123.052,111.236 124.058,111.236 124.73,111.236 125.891,110.075 125.891,109.259 128.343,106.807 131.699,106.807 133.096,108.204 133.096,111.887 U5.7 127.115,117.868 127.115,121.979 126.307,123.432 124.968,125.289 124.968,127.984 121.781,131.171 120.535,131.171 119.654,130.29 119.654,129.044 122.317,126.381 122.317,123.936 U5.12
NetJ11_2: J11.2 U3.J1_20 U5.5 U5.10 | length 73.3
  Bottom Layer w0.5: U3.J1_20 J11.2 116.861,86.889 116.861,98.81 114.701,100.97 114.701,110.49 ; U5.10 119.126,120.142 117.221,118.237 117.221,115.062 114.701,112.542 114.701,110.49 ; U5.5 129.905,112.538 129.905,110.733 129.17,109.998 128.016,109.998 125.386,112.628 125.238,112.628 124.09,113.776 121.039,113.776 117.753,110.49 114.701,110.49
NetJ12_2: J12.2 U3.J3_20 | length 3.8
  Bottom Layer w0.5: J12.2 U3.J3_20
NetJ12_3: J12.3 U3.J3_21 | length 3.8
  Bottom Layer w0.5: J12.3 U3.J3_21
NetJ12_4: J12.4 U3.J3_22 | length 3.8
  Bottom Layer w0.5: J12.4 U3.J3_22
NetQ1_1: Q1.1 R5.1 U10.1 | length 79.7
  Top Layer w0.5: v1(115.316,67.945) 115.316,73.279 117.646,75.609 131.36,75.609 v1(131.509,75.758)
  Bottom Layer w0.5: v1(115.316,67.945) 115.316,67.644 114.574,66.902 114.574,51.161 R5.1 118.745,47.169 120.678,49.102 120.678,60.811 123.724,63.857 123.724,68.186 124.586,69.048 129.072,69.048 Q1.1 ; v1(131.509,75.758) 131.509,76.164 132.334,76.989 U10.1
NetQ1_2: Q1.2 R3.1 | length 21.4
  Bottom Layer w0.5: R3.1 122.936,53.88 128.123,59.067 128.123,61.593 128.925,62.395 128.925,63.841 Q1.2
NetQ2_1: Q2.1 R2.1 U9.1 | length 28.9
  Top Layer w0.5: v1(121.412,72.39) 122.809,73.787 126.238,73.787 v1(126.365,73.66)
  Bottom Layer w0.5: R2.1 122.495,63.694 Q2.1 122.495,69.598 121.453,70.64 121.453,72.349 v1(121.412,72.39) ; U9.1 123.032,76.285 124.756,76.285 125.371,75.67 125.371,75.06 126.365,74.066 v1(126.365,73.66)
NetQ2_2: Q2.2 R6.1 | length 32.5
  Bottom Layer w0.5: R6.1 121.432,39.604 121.432,45.411 120.678,46.165 120.678,48.035 121.432,48.789 121.432,60.169 125.095,63.832 Q2.2
NetQ3_1: Q3.1 R1.1 R3.2 R7.2 | length 31.6
  Top Layer w0.5: R7.2 118.364,67.691 122.936,63.119 R3.2
  Bottom Layer w0.5: R7.2 118.364,82.296 Q3.1 ; R3.2 123.008,59.618 126.547,59.618 R1.1
NetQ4_1: Q4.1 R4.2 R6.2 R8.2 | length 54.6
  Bottom Layer w0.5: R6.2 R4.2 129.126,44.466 131.075,44.466 131.81,45.201 131.81,47.15 133.489,48.829 133.489,53.202 134.124,53.837 134.124,58.21 136.779,60.865 136.779,71.12 R8.2 138.811,73.179 139.827,74.195 139.827,81.026 Q4.1
NetR1_2: R1.2 U7.3 | length 12.2
  Bottom Layer w0.5: R1.2 126.619,53.34 127.873,54.594 131.075,54.594 131.81,53.859 131.81,52.821 130.747,51.758 130.747,50.991 U7.3
NetR4_1: R4.1 U7.6 | length 6.8
  Bottom Layer w0.5: R4.1 128.504,40.112 128.504,41.128 U7.6
NetU6_2: U6.2 U7.1 | length 48.5
  Top Layer w0.5: v1(115.57,30.353) 115.57,33.401 117.094,34.925 121.888,34.925 124.988,38.025 124.988,41.041 128.524,44.577 128.524,56.125 131.531,59.132 131.531,60.637 v1(131.777,60.882)
  Bottom Layer w0.5: v1(115.57,30.353) 115.633,30.416 118.427,30.416 U6.2 ; U7.1 131.056,56.38 131.056,59.839 131.777,60.56 v1(131.777,60.882)
Vin: J1.1 J11.3 U3.J1_21 | length 13.8
  Bottom Layer w0.5: U3.J1_21 113.03,84.328 116.078,87.376 116.078,90.895 115.57,91.403 J1.1
pads on no net: M1.1 M2.1 M3.1 M4.1 U6.4 U6.6 U6.8 U6.10 U6.12 U7.8 U7.11

## Polygon pours and split planes (outlines as drawn)
GND on Bottom Layer "NONET_L02_P001" (solid, shelved, pour order 1): 72.644,149.479 72.39,149.225 66.04,142.621 66.04,15.113 71.755,9.398 131.318,9.398 146.558,24.638 146.177,25.019 146.177,137.287 133.985,149.479
GND on Top Layer "NONET_L01_P000" (solid, shelved, pour order 0): 72.771,149.606 72.517,149.606 66.294,143.002 66.294,142.621 66.04,15.24 66.802,14.478 71.755,9.398 131.318,9.398 146.558,24.638 146.558,25.4 146.177,137.287 133.985,149.479

## Other copper
Top Layer:
  text "Buttons" at 118.237,147.066 h1.52
  text "Tilt" at 110.517,146.941 h1.52
  text "Azimut" at 71.501,145.923 h1.52
  text "THIS SIDE TOWARDS ENEMY" at 77.528,122.203 h1.52 r315
  text "TARP Motor Control 2.0" at 75.732,120.227 h1.52 r315
  text "Forspaendt & Antaendt" at 74.026,118.701 h1.52 r315
  text "Encoders" at 68.326,95.25 h1.52
  text "USB port here" at 86.614,91.948 h1.52
  text "Lil Koch" at 68.072,74.168 h1.52
  text "SDR" at 70.485,45.847 h1.52
  text "12V Vin" at 69.088,28.829 h1.52

## Text inside footprints (layer, text, board x,y; h text height)
U9: Mechanical 13 "TAB" at 122.741,80.112 h0.64
U10: Mechanical 13 "TAB" at 134.498,80.239 h0.64